# EAGLE board fet_overdrive (EAGLE 9.6.2)
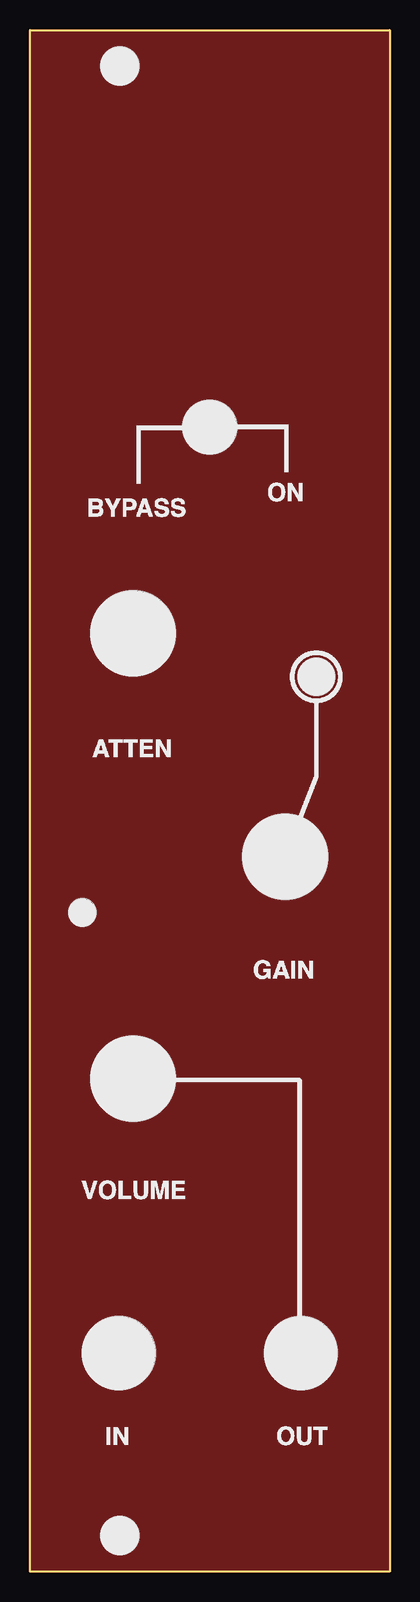
[diagram p0: board, top side]
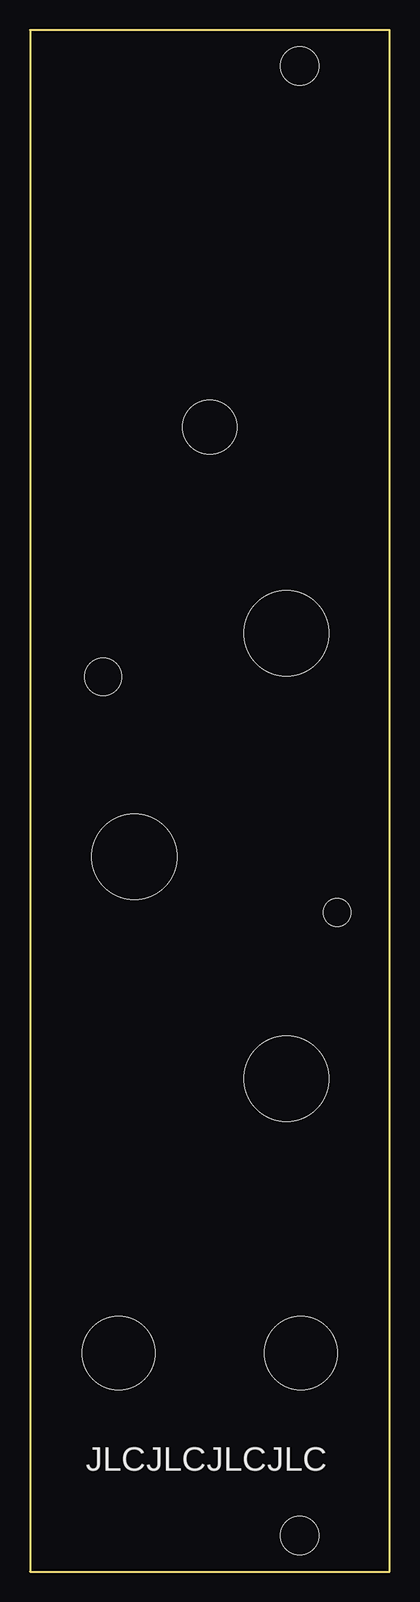
[diagram p1: board, bottom side, seen from below]

Size 30 x 128.5 mm. Coordinates in mm from the lower left corner, seen from the top.
Outline: 0,0 0,128.5 30,128.5 30,0 0,0
Copper layers (1*16): Top 0.035mm / dielectric 1.5mm / Bottom 0.035mm
Design rules "default *": minimum track width 6mil, minimum drill 0.35mm, track to track 6mil, track to pad 6mil, pad to pad 6mil, via to via 6mil, smd to smd 6mil, copper to edge 0mil, drill to drill 0mil, minimum pad ring 10mil, minimum via ring 8mil, stop-mask expansion 4mil, vias tented up to drill 0mil, thermal gap 10mil
Holes 7.1 mm at 8.6,78.2 21.3,59.6 8.6,41.1
Holes 6.1 mm at 7.4,18.2 22.6,18.2
Holes 3.2 mm at 7.5,3 7.5,125.5
Holes 3.1 mm at 23.9,74.6
Holes 2.29 mm at 4.37,54.93
Holes 4.49 mm at 15,95.4

## Placement (x,y rotation side)
E$1  [FET-COPPER]  0,0 0 top
E$2  [FET-SILK]  0,0 0 top

## Library data of the parts
E$1 E$2 = Graphics v30

## Tracks (layer width: path | path; a pad name or v marks a point on that pad's centre or on a via)
S$1
  pour Top: 0,0 0,128.4 0.1,128.5 30,128.5 30,0

## Text on the board
bPlace: JLCJLCJLCJLC